# EAGLE board OpenBook v48 (EAGLE 9.7.0)
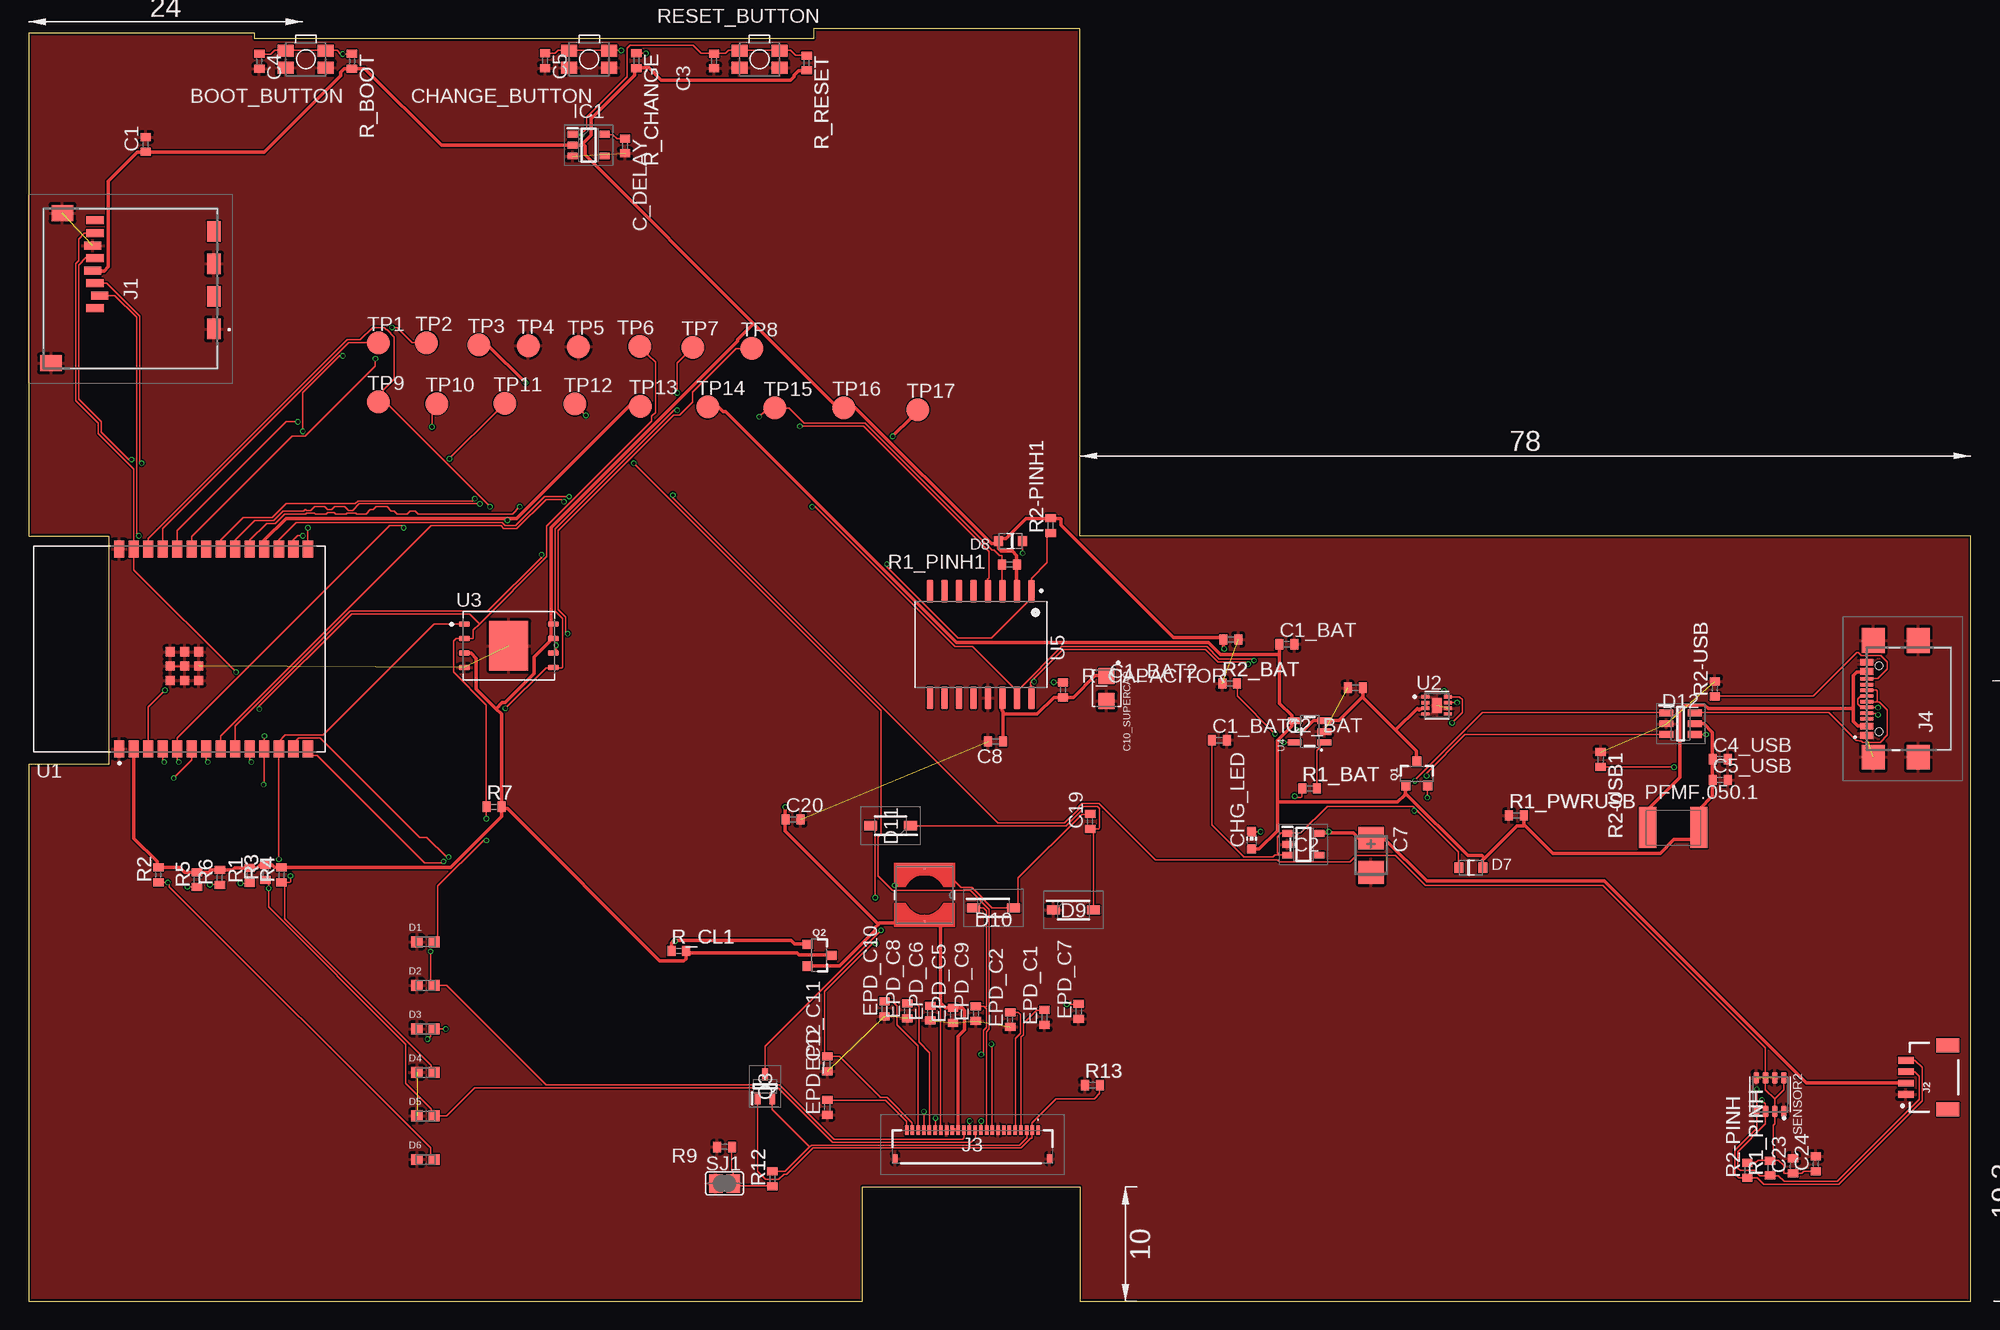
[diagram p0: board, top side]
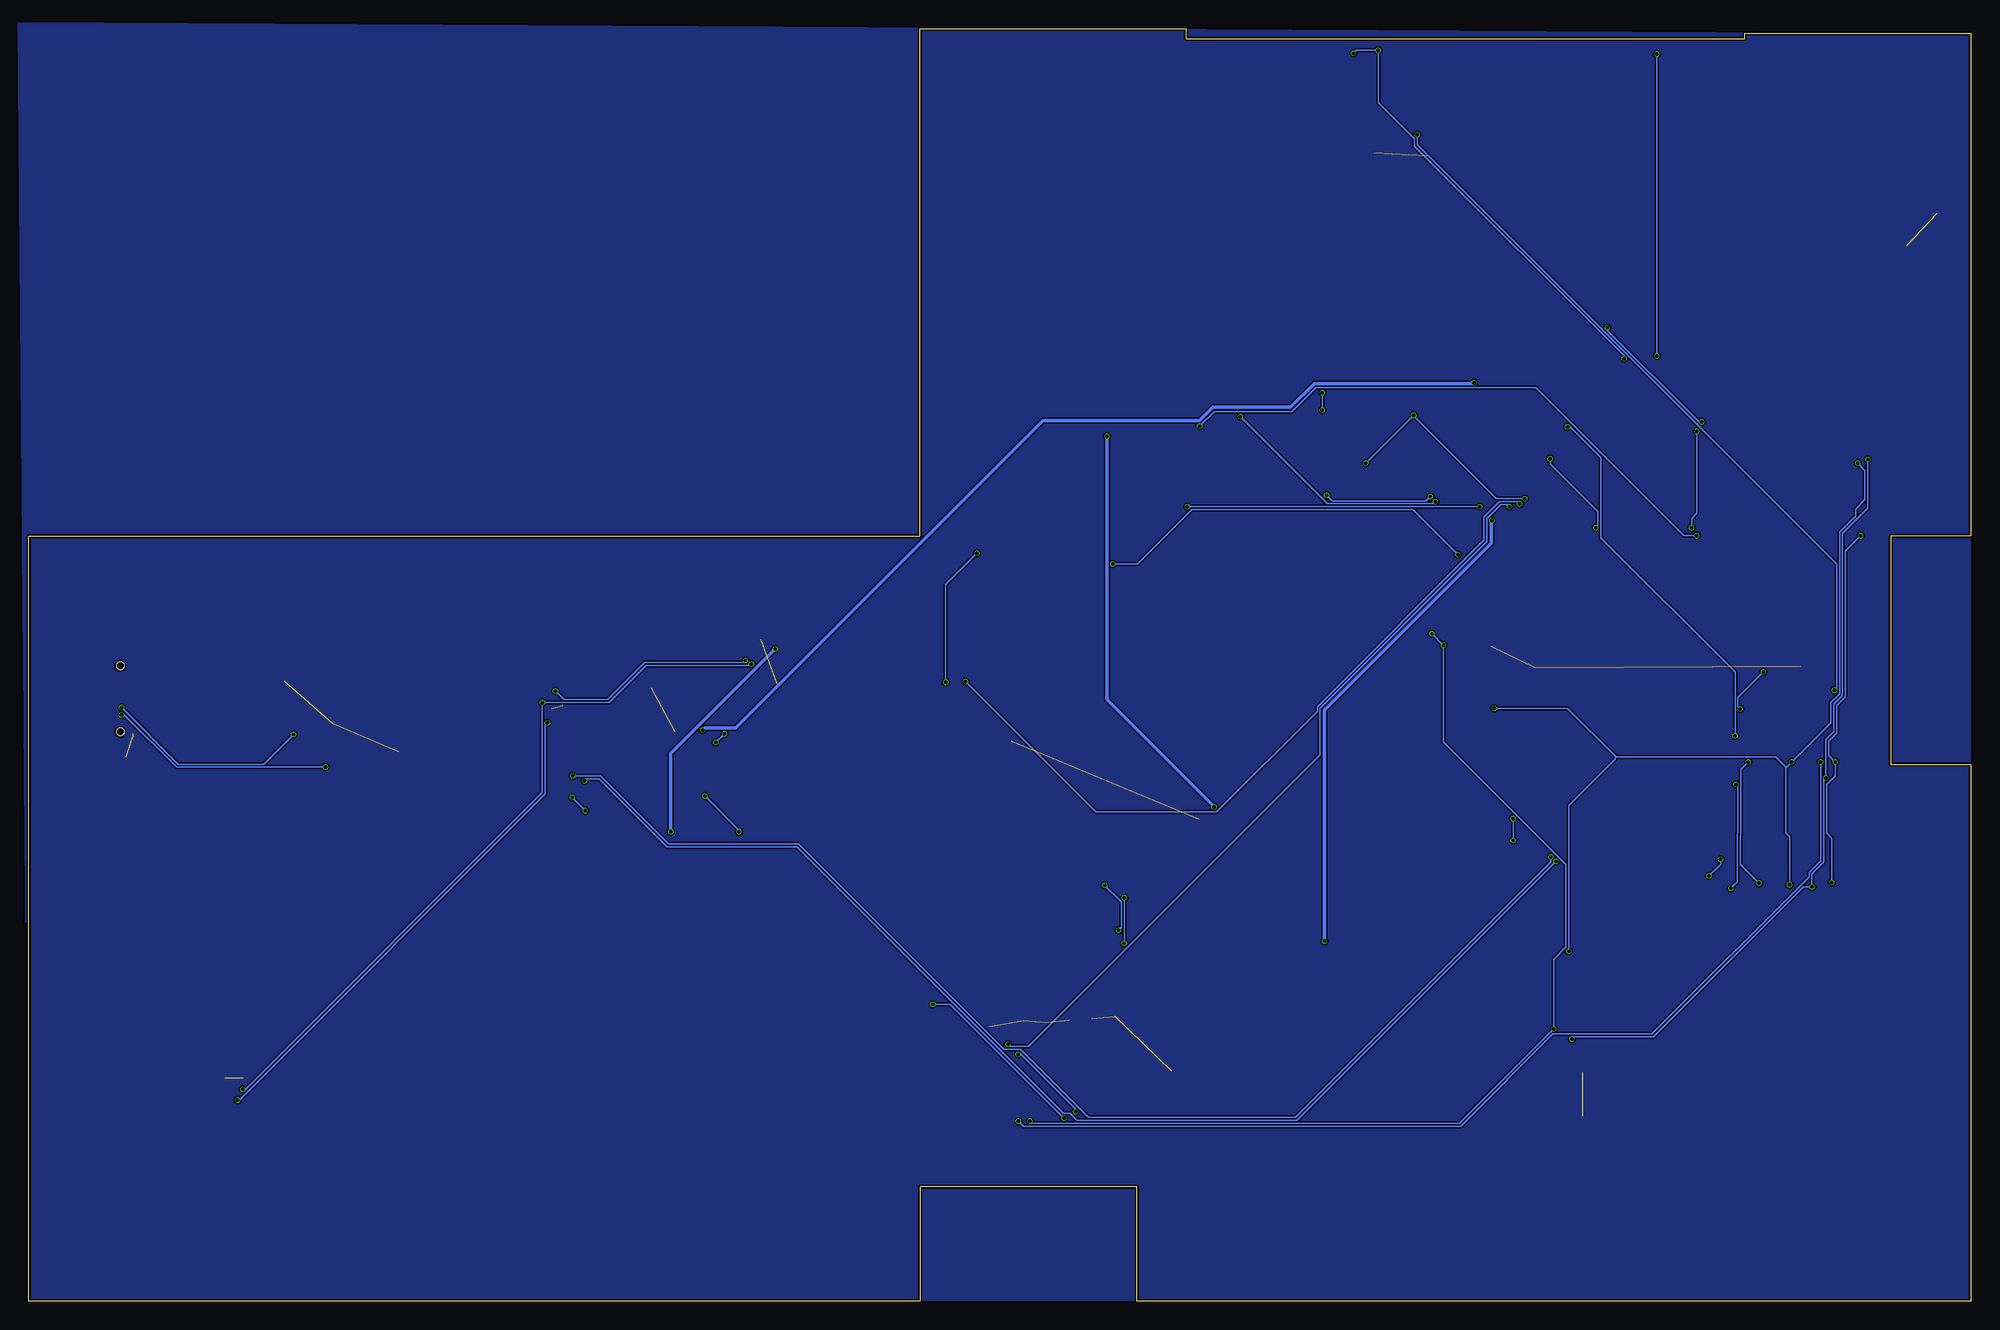
[diagram p1: board, bottom side, seen from below]

Size 170 x 111.4 mm. Coordinates in mm from the lower left corner, seen from the top.
Outline: 0,0 73,0 73,10 92,10 92,0 170,0 170,67 92,67 92,111.4 68.7,111.4 68.7,110.5 19.8,110.5 19.8,111 0,111 0,67 7,67 7,47 0,47 0,0
Copper layers (1*16): Top 0.035mm / dielectric 1.6mm / Bottom 0.035mm
Design rules "jlcpcb-2layers.dru": minimum track width 5mil, minimum drill 0.3mm, track to track 5mil, track to pad 5mil, pad to pad 5mil, via to via 5mil, smd to smd 5mil, copper to edge 0.2mm, drill to drill 6mil, minimum pad ring 10mil, minimum via ring 3mil, stop-mask expansion 4mil, vias tented up to drill 0mil, thermal gap 10mil
Net classes: 1 Alimentare: width 0.3 mm

## Footprints (pad centres in the part's own frame; a part is rotated, then mirrored left to right if it is on the bottom)
MYBUTTON = smd 1.4 x 1.05: 1 1.75,0.75; 2 -1.75,0.75; 3 -1.75,-0.75; 4 1.75,-0.75
EAGLE-LTSPICE_C0402 = smd 0.7 x 0.9: 1 -0.65,0; 2 0.65,0
RCL_CT3528 = smd 2 x 2.2: + -1.5,0; - 1.5,0
CAPCP3225X100N = smd 1.4 x 1.4: 1 -1.1,0; 2 1.1,0
ADAFRUIT_CHIP-LED0603 = smd 0.8 x 0.8: A 0,-0.75; C 0,0.75
DIOC1608X36N = smd 0.97 x 0.94: 1 -0.75,0; 2 0.75,0
ESP32_WROVER_AVX---SD0805S020S1R0_AVX_SD0805S020S1R0_0 = smd 0.8 x 0.9: 1 -1.05,0; 2 1.05,0
SOD3716X135N = smd 1.15 x 0.8: 1 -1.75,0; 2 1.75,0
SOT95P280X145-6N = smd 1.2 x 0.6: 1 -1.25,0.95; 2 -1.25,0; 3 -1.25,-0.95; 4 1.25,-0.95; 5 1.25,0; 6 1.25,0.95
SOT95P280X125-5N = smd 0.9 x 0.6: 1 -1.4,0.95; 2 -1.4,0; 3 -1.4,-0.95; 4 1.4,-0.95; 5 1.4,0.95
SOT95P280X120-5N = smd 0.9 x 0.6: 1 -1.4,0.95; 2 -1.4,0; 3 -1.4,-0.95; 4 1.4,-0.95; 5 1.4,0.95
112ATAARR03ATTEND = smd 1.8 x 1.2: G1 10.6,10.4; G2 4.9,10.4; S1 7.75,10.4; S2 2.05,10.4 | smd 1.4 x 1.9: G3 13.6,-3.85; G4 0.45,-2.85 | smd 0.7 x 1.5: P1 8.8,0; P2 7.7,0.4; P3 6.6,0; P4 5.5,-0.2; P5 4.4,0; P6 3.3,-0.2; P7 2.2,0; P8 1.1,0
JST04_1MM_RA = smd 0.6 x 1.35: 1 -1.5,0; 2 -0.5,0; 3 0.5,0; 4 1.5,0 | smd 1.2 x 2: NC1 2.8,-3.675; NC2 -2.8,-3.675
FH34SRJ24S05SH99 = smd 0.3 x 0.8: 1 5.75,1.45; 2 5.25,1.45; 3 4.75,1.45; 4 4.25,1.45; 5 3.75,1.45; 6 3.25,1.45; 7 2.75,1.45; 8 2.25,1.45; 9 1.75,1.45; 10 1.25,1.45; 11 0.75,1.45; 12 0.25,1.45; 13 -0.25,1.45; 14 -0.75,1.45; 15 -1.25,1.45; 16 -1.75,1.45; 17 -2.25,1.45; 18 -2.75,1.45; 19 -3.25,1.45; 20 -3.75,1.45; 21 -4.25,1.45; 22 -4.75,1.45; 23 -5.25,1.45; 24 -5.75,1.45 | smd 0.4 x 0.8: MP1 6.75,-1.05; MP2 -6.75,-1.05
SAMACSYS_PARTS_USB4110GFA = smd 0.3 x 1.15: A1 -3.35,3.678; A4 -2.55,3.678; A5 -1.25,3.678; A6 -0.25,3.678; A7 0.25,3.678; A8 1.25,3.678; A9 2.55,3.678; A12 3.35,3.678; B1 3.05,3.678; B4 2.25,3.678; B5 1.75,3.678; B6 0.75,3.678; B7 -0.75,3.678; B8 -1.75,3.678; B9 -2.25,3.678; B12 -3.05,3.678 | smd 2.18 x 2: MP1 -5.11,-0.827; MP2 5.11,-0.827; MP3 -5.11,3.103; MP4 5.11,3.103 | hole 0.65: -2.89,2.603; 2.89,2.603
IND_4828-WE-TPC_WRE = smd 0.127 x 0.127: 1 -2.286,0; 2 2.286,0
ESP32C6_VARISTOR_CT/CN1812 = smd 1.5 x 3.6: 1 -2.25,0; 2 2.25,0
ESP32_WROVER_SPARKFUN-DISCRETESEMI_SOT23-3 = smd 0.8 x 0.9: 1 -0.95,-1; 2 0.95,-1; 3 0,1.1
SOT65P210X110-3N = smd 1.05 x 0.5: 1 -1.05,0.65; 2 -1.05,-0.65; 3 1.05,0
ESP32_WROVER_EAGLE-LTSPICE_R0402 = smd 0.7 x 0.9: 1 -0.65,0; 2 0.65,0
ESP32_WROVER_BME680_PSON80P300X300X100-8N = smd 1.016 x 0.5: 1 1.458,1.2; 2 1.458,0.4; 3 1.458,-0.4; 4 1.458,-1.2; 5 -1.458,-1.22; 6 -1.458,-0.4; 7 -1.458,0.4; 8 -1.458,1.2
SJ = smd 1.168 x 1.6: 1 -0.762,0; 2 0.762,0
TP20R = smd 2 x 2: TP 0,0
XCVR_ESP32-C6-WROOM-1-N8 = smd 1.5 x 0.9: 1 -8.75,5.26; 2 -8.75,3.99; 3 -8.75,2.72; 4 -8.75,1.45; 5 -8.75,0.18; 6 -8.75,-1.09; 7 -8.75,-2.36; 8 -8.75,-3.63; 9 -8.75,-4.9; 10 -8.75,-6.17; 11 -8.75,-7.44; 12 -8.75,-8.71; 13 -8.75,-9.98; 14 -8.75,-11.25; 15 8.75,-11.25; 16 8.75,-9.98; 17 8.75,-8.71; 18 8.75,-7.44; 19 8.75,-6.17; 20 8.75,-4.9; 21 8.75,-3.63; 22 8.75,-2.36; 23 8.75,-1.09; 24 8.75,0.18; 25 8.75,1.45; 26 8.75,2.72; 27 8.75,3.99; 28 8.75,5.26 | smd 0.8 x 0.8: 29_1 -2.755,0.79; 29_2 -1.505,0.79; 29_3 -0.255,0.79; 29_4 -2.755,-0.46; 29_5 -1.505,-0.46; 29_6 -0.255,-0.46; 29_7 -2.755,-1.71; 29_8 -1.505,-1.71; 29_9 -0.255,-1.71
SON50P200X200X80-9N = smd 0.76 x 0.27: 1 -0.985,0.75; 2 -0.985,0.25; 3 -0.985,-0.25; 4 -0.985,-0.75; 5 0.985,-0.75; 6 0.985,-0.25; 7 0.985,0.25; 8 0.985,0.75 | smd 0.9 x 1.3: 9 0,0
SON127P600X800X80-9N = smd 0.94 x 0.44: 1 -3.895,1.905; 2 -3.895,0.635; 3 -3.895,-0.635; 4 -3.895,-1.905; 5 3.895,-1.905; 6 3.895,-0.635; 7 3.895,0.635; 8 3.895,1.905 | smd 3.4 x 4.3: 9 0,0
ESP32_WROVER_SPARKFUN-IC-POWER_SOT23-5 = smd 0.55 x 1.2: 1 -0.95,-1.3; 2 0,-1.3; 3 0.95,-1.3; 4 0.95,1.3; 5 -0.95,1.3
SOIC127P1032X265-16N = smd 2.05 x 0.59: 1 -4.655,4.445; 2 -4.655,3.175; 3 -4.655,1.905; 4 -4.655,0.635; 5 -4.655,-0.635; 6 -4.655,-1.905; 7 -4.655,-3.175; 8 -4.655,-4.445; 9 4.655,-4.445; 10 4.655,-3.175; 11 4.655,-1.905; 12 4.655,-0.635; 13 4.655,0.635; 14 4.655,1.905; 15 4.655,3.175; 16 4.655,4.445

## Placement (x,y rotation side)
BOOT_BUTTON  [MYBUTTON]  24.27,108.71 180 top
C1  100nF  [EAGLE-LTSPICE_C0402]  10.25,101.26 90 top
C1_BAT  4.7uF  [EAGLE-LTSPICE_C0402]  110.12,57.51 0 top
C1_BAT1  4.7uF  [EAGLE-LTSPICE_C0402]  104.23,49.11 0 top
C1_BAT2  4.7uF  [EAGLE-LTSPICE_C0402]  105.23,57.92 0 top
C2_BAT  4.7uF  [EAGLE-LTSPICE_C0402]  116.12,53.7 180 top
C3  1uF  [EAGLE-LTSPICE_C0402]  60,108.56 270 top
C4  100nF  [EAGLE-LTSPICE_C0402]  20.2,108.53 270 top
C4_USB  100nF  [EAGLE-LTSPICE_C0402]  148.05,47.44 0 top
C5  100nF  [EAGLE-LTSPICE_C0402]  45.2,108.59 270 top
C5_USB  4.7uF  [EAGLE-LTSPICE_C0402]  148.05,45.63 0 top
C7  100uF TANT  [RCL_CT3528]  117.5,39.03 270 top
C8  100nF  [EAGLE-LTSPICE_C0402]  84.63,49 180 top
C10_SUPERCAP  CPH3225A  [CAPCP3225X100N]  94.35,53.64 270 top
C19  4.7uF/25V  [EAGLE-LTSPICE_C0402]  92.91,41.99 90 top
C20  10uF  [EAGLE-LTSPICE_C0402]  66.91,42.18 0 top
C23  100nF  [EAGLE-LTSPICE_C0402]  154.43,11.85 90 top
C24  100nF  [EAGLE-LTSPICE_C0402]  156.43,12.04 90 top
C_DELAY  100nF  [EAGLE-LTSPICE_C0402]  52.2,101.12 270 top
CHANGE_BUTTON  [MYBUTTON]  49.07,108.71 180 top
CHG_LED  [ADAFRUIT_CHIP-LED0603]  107.04,40.35 0 top
D1  PGB1010603MR  [DIOC1608X36N]  34.74,31.46 0 top
D2  PGB1010603MR  [DIOC1608X36N]  34.74,27.65 0 top
D3  PGB1010603MR  [DIOC1608X36N]  34.74,23.84 0 top
D4  PGB1010603MR  [DIOC1608X36N]  34.74,20.03 0 top
D5  PGB1010603MR  [DIOC1608X36N]  34.74,16.22 0 top
D6  PGB1010603MR  [DIOC1608X36N]  34.74,12.41 0 top
D7  ESP32_WROVER_AVX---SD0805S020S1R0_AVX_SD0805S020S1R0_0_0AVX_SD0805S020S1R0_0_0  [ESP32_WROVER_AVX---SD0805S020S1R0_AVX_SD0805S020S1R0_0]  126.23,37.95 0 top
D8  ESP32_WROVER_AVX---SD0805S020S1R0_AVX_SD0805S020S1R0_0_0AVX_SD0805S020S1R0_0_0  [ESP32_WROVER_AVX---SD0805S020S1R0_AVX_SD0805S020S1R0_0]  85.93,66.53 180 top
D9  MBR0530  [SOD3716X135N]  91.45,34.24 0 top
D10  MBR0530  [SOD3716X135N]  84.45,34.43 0 top
D11  MBR0530  [SOD3716X135N]  75.45,41.62 180 top
D12  USBLC6-2SC6Y  [SOT95P280X145-6N]  144.59,50.55 0 top
EPD_C1  1uF/50V  [EAGLE-LTSPICE_C0402]  88.91,24.84 90 top
EPD_C2  1uF/50V  [EAGLE-LTSPICE_C0402]  85.91,24.65 90 top
EPD_C5  1uF/50V  [EAGLE-LTSPICE_C0402]  80.91,25.03 90 top
EPD_C6  1uF/50V  [EAGLE-LTSPICE_C0402]  78.91,25.22 90 top
EPD_C7  1uF/50V  [EAGLE-LTSPICE_C0402]  91.91,25.36 90 top
EPD_C8  1uF/50V  [EAGLE-LTSPICE_C0402]  76.91,25.41 90 top
EPD_C9  1uF/50V  [EAGLE-LTSPICE_C0402]  82.91,25.17 90 top
EPD_C10  1uF/50V  [EAGLE-LTSPICE_C0402]  74.91,25.6 90 top
EPD_C11  1uF/50V  [EAGLE-LTSPICE_C0402]  69.91,20.79 90 top
EPD_C12  1uF/50V  [EAGLE-LTSPICE_C0402]  69.91,16.98 90 top
IC1  BD5229G-TR  [SOT95P280X125-5N]  49.01,101.2 0 top
IC2  XC6220A331MR-G  [SOT95P280X120-5N]  111.58,40 0 top
J1  112A-TAAR-R03_ATTEND  [112ATAARR03ATTEND]  5.82,95.71 270 top
J2  QWIIC_RIGHT_ANGLE  [JST04_1MM_RA]  164.31,19.6 90 top
J3  FH34SRJ-24S-0.5SH_99_  [FH34SRJ24S05SH99]  82.6,13.53 0 top
J4  SAMACSYS_PARTS_USB4110-GF-A  [SAMACSYS_PARTS_USB4110GFA]  164.56,52.73 90 top
L1  68uH  [IND_4828-WE-TPC_WRE]  78.42,35.56 270 top
PFMF.050.1  ESP32C6_VARISTORCN1812  [ESP32C6_VARISTOR_CT/CN1812]  143.95,41.46 0 top
Q1  20V/4.2A/52mΩ/1.4W  [ESP32_WROVER_SPARKFUN-DISCRETESEMI_SOT23-3]  121.5,46.14 0 top
Q2  20V/4.2A/52mΩ/1.4W  [ESP32_WROVER_SPARKFUN-DISCRETESEMI_SOT23-3]  69.18,30.28 270 top
Q3  SI1308EDL-T1-GE3  [SOT65P210X110-3N]  64.45,18.81 90 top
R1  10K  [ESP32_WROVER_EAGLE-LTSPICE_R0402]  19.36,37.26 90 top
R1_BAT  200  [ESP32_WROVER_EAGLE-LTSPICE_R0402]  112.12,44.89 0 top
R1_PINH  10K  [ESP32_WROVER_EAGLE-LTSPICE_R0402]  152.43,11.66 90 top
R1_PINH1  10k  [ESP32_WROVER_EAGLE-LTSPICE_R0402]  85.85,64.48 0 top
R1_PWRUSB  100K  [ESP32_WROVER_EAGLE-LTSPICE_R0402]  130.23,42.52 0 top
R2  10K  [ESP32_WROVER_EAGLE-LTSPICE_R0402]  11.36,37.33 90 top
R2-PINH  10K  [ESP32_WROVER_EAGLE-LTSPICE_R0402]  150.43,11.47 90 top
R2-PINH1  10k  [ESP32_WROVER_EAGLE-LTSPICE_R0402]  89.45,67.89 90 top
R2-USB  5k1  [ESP32_WROVER_EAGLE-LTSPICE_R0402]  147.59,53.6 90 top
R2-USB1  5k1  [ESP32_WROVER_EAGLE-LTSPICE_R0402]  137.59,47.41 270 top
R2_BAT  2K  [ESP32_WROVER_EAGLE-LTSPICE_R0402]  105.12,54.08 0 top
R3  10K  [ESP32_WROVER_EAGLE-LTSPICE_R0402]  20.74,37.52 90 top
R4  10K  [ESP32_WROVER_EAGLE-LTSPICE_R0402]  22.14,37.31 90 top
R5  10K  [ESP32_WROVER_EAGLE-LTSPICE_R0402]  14.74,36.9 90 top
R6  10K  [ESP32_WROVER_EAGLE-LTSPICE_R0402]  16.74,37.09 90 top
R7  10K  [ESP32_WROVER_EAGLE-LTSPICE_R0402]  40.74,43.28 0 top
R9  [ESP32_WROVER_EAGLE-LTSPICE_R0402]  60.91,13.5 0 top
R12  0.47  [ESP32_WROVER_EAGLE-LTSPICE_R0402]  65.1,10.73 90 top
R13  10K  [ESP32_WROVER_EAGLE-LTSPICE_R0402]  93.1,18.92 0 top
R_BOOT  10K  [ESP32_WROVER_EAGLE-LTSPICE_R0402]  28.31,108.53 270 top
R_CAPACITOR  15  [ESP32_WROVER_EAGLE-LTSPICE_R0402]  90.53,53.51 270 top
R_CHANGE  10k  [ESP32_WROVER_EAGLE-LTSPICE_R0402]  53.2,108.58 270 top
R_CL1  10K  [ESP32_WROVER_EAGLE-LTSPICE_R0402]  56.91,30.66 0 top
R_RESET  10K  [ESP32_WROVER_EAGLE-LTSPICE_R0402]  68.1,108.38 270 top
RESET_BUTTON  [MYBUTTON]  63.97,108.71 180 top
SENSOR2  ESP32_WROVER_BME680_BME680  [ESP32_WROVER_BME680_PSON80P300X300X100-8N]  152.43,18.09 270 top
SJ1  [SJ]  60.91,10.31 0 top
TP1  TPTP20R  [TP20R]  30.63,83.87 0 top
TP2  TPTP20R  [TP20R]  34.83,83.89 0 top
TP3  TPTP20R  [TP20R]  39.43,83.71 0 top
TP4  TPTP20R  [TP20R]  43.73,83.63 0 top
TP5  TPTP20R  [TP20R]  48.13,83.55 0 top
TP6  TPTP20R  [TP20R]  53.48,83.57 0 top
TP7  TPTP20R  [TP20R]  58.13,83.49 0 top
TP8  TPTP20R  [TP20R]  63.31,83.39 0 top
TP9  TPTP20R  [TP20R]  30.63,78.71 0 top
TP10  TPTP20R  [TP20R]  35.73,78.57 0 top
TP11  TPTP20R  [TP20R]  41.68,78.59 0 top
TP12  TPTP20R  [TP20R]  47.83,78.53 0 top
TP13  TPTP20R  [TP20R]  53.53,78.35 0 top
TP14  TPTP20R  [TP20R]  59.43,78.27 0 top
TP15  TPTP20R  [TP20R]  65.33,78.19 0 top
TP16  TPTP20R  [TP20R]  71.33,78.21 0 top
TP17  TPTP20R  [TP20R]  77.83,78.03 0 top
U1  ESP32-C6-WROOM-1-N8  [XCVR_ESP32-C6-WROOM-1-N8]  13.19,57.1 90 top
U2  MAX17048G+T10  [SON50P200X200X80-9N]  123.25,52.15 0 top
U3  W25Q512JVEIQ  [SON127P600X800X80-9N]  42.03,57.37 0 top
U4  ESP32_WROVER_SPARKFUN-IC-POWER_MCP73831  [ESP32_WROVER_SPARKFUN-IC-POWER_SOT23-5]  112.12,49.86 90 top
U5  DS3231SN#  [SOIC127P1032X265-16N]  83.34,57.48 270 top

## Library data of the parts
BOOT_BUTTON CHANGE_BUTTON CHG_LED PFMF.050.1 RESET_BUTTON SJ1 TP1-TP17 = DeskAssistant v19 v1
C1 C1_BAT C1_BAT1 C1_BAT2 C2_BAT C3 C4 C4_USB C5 C5_USB C8 C19 C20 C23 C24 C_DELAY EPD_C1 EPD_C2 EPD_C5-EPD_C12 = DeskAssistant v19 v1; SPICEMODEL: NONE; SPICEPREFIX: C
C7 = DeskAssistant v19 v1; SPICEPREFIX: C
C10_SUPERCAP = DeskAssistant v19 v1; AVAILABILITY: Not in stock; CHECK_PRICES: https://www.snapeda.com/parts/CPH3225A/Seiko+Instruments/view-part/?ref=eda; DESCRIPTION: 11 mF (EDLC) Supercapacitor 3.3 V 1210 (3225 Metric) - -; MF: Seiko Instruments; MP: CPH3225A; PACKAGE: 1210 Seiko; PRICE: None; PURCHASE-URL: https://www.snapeda.com/api/url_track_click_mouser/?unipart_id=562593&manufacturer=Seiko Instruments&part_name=CPH3225A&search_term=None; SNAPEDA_LINK: https://www.snapeda.com/parts/CPH3225A/Seiko+Instruments/view-part/?ref=snap
D1-D6 = DeskAssistant v19 v1; AVAILABILITY: In Stock; CHECK_PRICES: https://www.snapeda.com/parts/PGB1010603MR/Littelfuse/view-part/?ref=eda; DESCRIPTION: 150V (Typ) Clamp - Ipp Tvs Diode Surface Mount 0603 (1608 Metric); MF: Littelfuse Inc.; MP: PGB1010603MR; PACKAGE: 0603 Littelfuse Inc.; PRICE: None; PURCHASE-URL: https://www.snapeda.com/api/url_track_click_mouser/?unipart_id=5659453&manufacturer=Littelfuse Inc.&part_name=PGB1010603MR&search_term=None; SNAPEDA_LINK: https://www.snapeda.com/parts/PGB1010603MR/Littelfuse/view-part/?ref=snap
D7 D8 = DeskAssistant v19 v1; CENTROID_NOT_SPECIFIED: No; DATASHEET: http://datasheets.avx.com/schottky.pdf; DIGIKEY_DESCRIPTION: DIODE SCHOTTKY 20V 1A 0805; DIGIKEY_PART_NUMBER: 478-7800-1-ND; LEAD_FREE: yes; MF: AVX; MOUSER_PART_NUMBER: 581-SD0805S020S1R0; PACKAGE: 0805 (2012 metric); PREFIX: D; ROHS: yes; TEMPERATURE_RANGE_HIGH: +125°C; TEMPERATURE_RANGE_LOW: -55°C
D9-D11 = DeskAssistant v19 v1; AVAILABILITY: In Stock; CHECK_PRICES: https://www.snapeda.com/parts/MBR0530/Onsemi/view-part/?ref=eda; DESCRIPTION: Diode Schottky 30 V 500mA Surface Mount SOD-123; MF: ON Semiconductor; MP: MBR0530; PACKAGE: SOD-123-2 ON Semiconductor; PRICE: None; PURCHASE-URL: https://www.snapeda.com/api/url_track_click_mouser/?unipart_id=179458&manufacturer=ON Semiconductor&part_name=MBR0530&search_term=None; SNAPEDA_LINK: https://www.snapeda.com/parts/MBR0530/Onsemi/view-part/?ref=snap
D12 = DeskAssistant v19 v1; AVAILABILITY: In Stock; CHECK_PRICES: https://www.snapeda.com/parts/USBLC6-2SC6Y/STMicroelectronics/view-part/?ref=eda; DESCRIPTION: 17V Clamp 5A (8/20µs) Ipp Tvs Diode Surface Mount SOT-23-6; MF: STMicroelectronics; MP: USBLC6-2SC6Y; PACKAGE: SOT-23-6 STMicroelectronics; PRICE: None; SNAPEDA_LINK: https://www.snapeda.com/parts/USBLC6-2SC6Y/STMicroelectronics/view-part/?ref=snap
IC1 = DeskAssistant v19 v1; DESCRIPTION: Voltage Detector with Adjustable Delay Time: CMOS processes are utilized to develop high precision, low current consumption CMOS reset ICs that allow arbitrary setting of the delay time. The extensive lineup includes both Nch Open Drain and CMOS output types in a wide range of detection voltages (from 2.3V to 6.0V, in 0.1V steps), enabling selection of the ideal solution based on customer requirements. In addition, the entire series is of course both lead-free and RoHS-compliant.; HEIGHT: 1.25mm; MANUFACTURER_NAME: ROHM Semiconductor; MANUFACTURER_PART_NUMBER: BD5229G-TR; MOUSER_PART_NUMBER: 755-BD5229G-TR; MOUSER_PRICE-STOCK: https://www.mouser.co.uk/ProductDetail/ROHM-Semiconductor/BD5229G-TR?qs=4kLU8WoGk0vvnhrrYwdszw%3D%3D
IC2 = DeskAssistant v19 v1; DESCRIPTION: LDO Voltage Regulators; HEIGHT: 1.2mm; MANUFACTURER_NAME: Torex; MANUFACTURER_PART_NUMBER: XC6220A331MR-G; MOUSER_PART_NUMBER: 865-XC6220A331MR-G; MOUSER_PRICE-STOCK: https://www.mouser.co.uk/ProductDetail/Torex-Semiconductor/XC6220A331MR-G?qs=AsjdqWjXhJ8ZSWznL1J0gg%3D%3D
J1 = DeskAssistant v19 v1; DESCRIPTION: Micro SD Card Socket, Push-Push Type, Top Mount, SMT, H=1.83mm, 10u; HEIGHT: 1.9mm; MANUFACTURER_NAME: ATTEND; MANUFACTURER_PART_NUMBER: 112A-TAAR-R03 ATTEND
J2 = DeskAssistant v19 v1; PROD_ID: CONN-13694
J3 = DeskAssistant v19 v1; DESCRIPTION: 24 Position FFC, FPC Connector Contacts, Top and Bottom 0.020" (0.50mm) Surface Mount, Right Angle; HEIGHT: 1.1mm; MANUFACTURER_NAME: Hirose; MANUFACTURER_PART_NUMBER: FH34SRJ-24S-0.5SH(99); MOUSER_PART_NUMBER: 798-FH34SRJ24S05SH99; MOUSER_PRICE-STOCK: https://www.mouser.co.uk/ProductDetail/Hirose-Connector/FH34SRJ-24S-0.5SH99?qs=vcbW%252B4%252BSTIpKBl5ap9J8Fw%3D%3D
J4 = DeskAssistant v19 v1; DESCRIPTION: CONN USB 2.0 TYPE-C R/A SMT; HEIGHT: 3.26mm; MANUFACTURER_NAME: GCT (GLOBAL CONNECTOR TECHNOLOGY); MANUFACTURER_PART_NUMBER: USB4110-GF-A; MOUSER_PART_NUMBER: 640-USB4110-GF-A; MOUSER_PRICE-STOCK: https://www.mouser.co.uk/ProductDetail/GCT/USB4110-GF-A?qs=KUoIvG%2F9IlYiZvIXQjyJeA%3D%3D
L1 = DeskAssistant v19 v1; COPYRIGHT: Copyright (C) 2024 Ultra Librarian. All rights reserved.; MANUFACTURER_PART_NUMBER: 744043680; MFR_NAME: Wurth Electronics
Q1 Q2 = DeskAssistant v19 v1; PROD_ID: TRAN-14388
Q3 = DeskAssistant v19 v1; AVAILABILITY: In Stock; CHECK_PRICES: https://www.snapeda.com/parts/SI1308EDL-T1-GE3/Vishay+Siliconix/view-part/?ref=eda; DESCRIPTION: Si1308EDL-T1-GE3 N-channel MOSFET Transistor, 1.5 A, 30 V, 3-Pin SC-70 | Siliconix / Vishay SI1308EDL-T1-GE3; MF: Vishay Siliconix; MP: SI1308EDL-T1-GE3; PACKAGE: SOT-323 Vishay Semiconductor; PRICE: None; PURCHASE-URL: https://www.snapeda.com/api/url_track_click_mouser/?unipart_id=274603&manufacturer=Vishay Siliconix&part_name=SI1308EDL-T1-GE3&search_term=None; SNAPEDA_LINK: https://www.snapeda.com/parts/SI1308EDL-T1-GE3/Vishay+Siliconix/view-part/?ref=snap
R1 R1_BAT R1_PINH R1_PINH1 R1_PWRUSB R2 R2-PINH R2-PINH1 R2-USB R2-USB1 R2_BAT R3-R7 R9 R12 R13 R_BOOT R_CAPACITOR R_CHANGE R_CL1 R_RESET = DeskAssistant v19 v1; SPICEMODEL: NONE; SPICEPREFIX: R
SENSOR2 = DeskAssistant v19 v1; AVAILABILITY: Unavailable; DESCRIPTION: Integrated Environmental Unit; MF: Bosch Sensortec; MP: BME680; PACKAGE: LGA-8 Bosch Tools; PRICE: None
U1 = DeskAssistant v19 v1; AVAILABILITY: In Stock; CHECK_PRICES: https://www.snapeda.com/parts/ESP32-C6-WROOM-1-N8/Espressif+Systems/view-part/?ref=eda; DESCRIPTION: Multiprotocol Modules ESP32-C6 module, Wi-Fi 6 in 2.4 GHz band, Bluetooth 5, Zigbee 3.0 and Thread. ESP34-WROOM Compatible - ENGINEERING SAMPLE; MF: Espressif Systems; MP: ESP32-C6-WROOM-1-N8; PACKAGE: None; PRICE: None; SNAPEDA_LINK: https://www.snapeda.com/parts/ESP32-C6-WROOM-1-N8/Espressif+Systems/view-part/?ref=snap
U2 = DeskAssistant v19 v1; AVAILABILITY: In Stock; CHECK_PRICES: https://www.snapeda.com/parts/MAX17048G+T10/Analog+Devices/view-part/?ref=eda; DESCRIPTION: 3µA 1-Cell/2-Cell Fuel Gauge with ModelGauge; MF: Analog Devices; MP: MAX17048G+T10; PACKAGE: TDFN-8 Maxim; PRICE: None; PURCHASE-URL: https://www.snapeda.com/api/url_track_click_mouser/?unipart_id=329239&manufacturer=Analog Devices&part_name=MAX17048G+T10&search_term=None; SNAPEDA_LINK: https://www.snapeda.com/parts/MAX17048G+T10/Analog+Devices/view-part/?ref=snap
U3 = DeskAssistant v19 v1; AVAILABILITY: In Stock; CHECK_PRICES: https://www.snapeda.com/parts/W25Q512JVEIQ/Winbond+Electronics/view-part/?ref=eda; DESCRIPTION: FLASH - NOR Memory IC 512Mb (64M x 8) SPI - Quad I/O 133 MHz 8-WSON (8x6); MF: Winbond Electronics; MP: W25Q512JVEIQ; PACKAGE: Package; PRICE: None; SNAPEDA_LINK: https://www.snapeda.com/parts/W25Q512JVEIQ/Winbond+Electronics/view-part/?ref=snap
U4 = DeskAssistant v19 v1; PROD_ID: IC-09995
U5 = DeskAssistant v19 v1; AVAILABILITY: In Stock; CHECK_PRICES: https://www.snapeda.com/parts/DS3231SN%23/Analog+Devices/view-part/?ref=eda; DESCRIPTION: Extremely Accurate I²C-Integrated RTC/TCXO/Crystal; MF: Analog Devices; MP: DS3231SN#; PACKAGE: SOIC-16 Maxim; PRICE: None; PURCHASE-URL: https://www.snapeda.com/api/url_track_click_mouser/?unipart_id=99048&manufacturer=Analog Devices&part_name=DS3231SN#&search_term=None; SNAPEDA_LINK: https://www.snapeda.com/parts/DS3231SN%23/Analog+Devices/view-part/?ref=snap

## Nets
3V3 [Alimentare]: C1.1 C1_BAT2.1 C7.+ D8.2 IC1.2 IC2.5 J1.P4 J2.2 Q2.3 R1.2 R1_PINH1.2 R2-PINH1.2 R2.2 R3.2 R4.2 R5.2 R6.2 R7.2 R_BOOT.2 R_CHANGE.2 R_CL1.2 R_RESET.2 TP16.TP U1.2 U3.3 U3.7 U3.8 U5.2
32KHZ: R2-PINH1.1 U1.9 U5.1
DN: D12.4 J4.A7 J4.B7
DP: D12.6 J4.A6 J4.B6
EPD_3V3 [Alimentare]: C20.1 EPD_C5.2 J3.15 J3.16 L1.2 Q2.2 TP17.TP
EPD_3V3_C [Alimentare]: Q2.1 R_CL1.1 TP13.TP U1.18
EPD_BUSY: J3.9 TP9.TP U1.26
EPD_CS: D5.2 J3.12 R3.1 TP10.TP U1.11
EPD_DC: J3.11 TP11.TP U1.5
EPD_RST: J3.10 TP12.TP U1.21
FLASH_CS: D4.2 R4.1 U1.12 U3.1
GDR: J3.2 Q3.1 R13.2
GND: BOOT_BUTTON.1 BOOT_BUTTON.2 C1.2 C1_BAT1.2 C1_BAT2.2 C1_BAT.2 C2_BAT.2 C3.2 C4.2 C4_USB.2 C5.2 C5_USB.2 C7.- C8.2 C10_SUPERCAP.2 C20.2 C23.2 C24.2 C_DELAY.2 CHANGE_BUTTON.1 CHANGE_BUTTON.2 D1.1 D2.1 D3.1 D4.1 D5.1 D6.1 D9.1 D12.2 EPD_C1.1 EPD_C2.1 EPD_C5.1 EPD_C6.1 EPD_C7.1 EPD_C8.1 EPD_C9.1 EPD_C10.1 EPD_C11.1 EPD_C12.1 IC1.3 IC2.2 J1.G1 J1.G2 J1.G3 J1.G4 J1.P6 J2.1 J3.8 J3.17 J3.MP1 J3.MP2 J4.A1 J4.A12 J4.B1 J4.B12 J4.MP1 J4.MP2 J4.MP3 J4.MP4 R1_PWRUSB.1 R2-USB1.1 R2-USB.2 R2_BAT.1 R9.1 R13.1 RESET_BUTTON.1 RESET_BUTTON.2 SENSOR2.1 SENSOR2.5 SENSOR2.7 SJ1.1 TP4.TP TP5.TP U1.1 U1.28 U1.29_1 U1.29_2 U1.29_3 U1.29_4 U1.29_5 U1.29_6 U1.29_7 U1.29_8 U1.29_9 U2.1 U2.4 U2.6 U2.9 U3.4 U3.9 U4.2 U5.13
GPIO8: R1.1 U1.10
I2C_PW: C23.1 C24.1 R1_PINH.2 R2-PINH.2 SENSOR2.2 SENSOR2.6 SENSOR2.8 U1.17
INT_RTC: R1_PINH1.1 TP15.TP U1.8 U5.3
IO/BOOT: BOOT_BUTTON.3 BOOT_BUTTON.4 C4.1 R_BOOT.1 U1.15
IO/CHANGE: C5.1 CHANGE_BUTTON.3 CHANGE_BUTTON.4 R_CHANGE.1 U1.23
MISO: D1.2 J1.P7 R7.1 TP6.TP U1.27 U3.2
MOSI: D2.2 J1.P3 J3.14 R6.1 TP7.TP U1.7 U3.5
N$3: C_DELAY.1 IC1.5
N$4: C1_BAT1.1 D7.1 IC2.1 IC2.3 Q1.2
N$5: CHG_LED.C R1_BAT.1
N$6: R1_BAT.2 U4.1
N$7: R2_BAT.2 U4.5
N$8: D8.1 R_CAPACITOR.1
N$11: C19.1 D9.2 D11.1
N$12: J4.A5 R2-USB1.2
N$13: J4.B5 R2-USB.1
N$18: EPD_C2.2 J3.5
N$19: EPD_C1.2 J3.4
N$20: EPD_C6.2 J3.18
N$21: EPD_C8.2 J3.20
N$22: EPD_C10.2 J3.22
N$25: EPD_C7.2 J3.19
N$26: EPD_C12.2 J3.24
PREVGH: D10.1 EPD_C9.2 J3.21
PREVGL: D11.2 EPD_C11.2 J3.23
RESE: J3.3 Q3.2 R12.2
RESE': R9.2 R12.1 SJ1.2
RESET: C3.1 IC1.1 R_RESET.1 RESET_BUTTON.3 RESET_BUTTON.4 U1.3
RTC_RST: U1.16 U5.4
RX: TP2.TP U1.24
SCK: D3.2 J1.P5 J3.13 R5.1 TP8.TP U1.6 U3.6
SCL: J2.4 R2-PINH.1 SENSOR2.4 U1.20 U2.7 U5.16
SDA: J2.3 R1_PINH.1 SENSOR2.3 U1.19 U2.8 U5.15
SRC: C19.2 D10.2 L1.1 Q3.3
SS_SD: D6.2 J1.P2 R2.1 U1.4
TX: TP1.TP U1.25
USB_D+: D12.1 U1.14
USB_D-: D12.3 U1.13
VBAT [Alimentare]: C2_BAT.1 Q1.3 TP3.TP U2.2 U2.3 U4.3
VBUS [Alimentare]: C1_BAT.1 C4_USB.1 C5_USB.1 CHG_LED.A D7.2 D12.5 PFMF.050.1.2 Q1.1 R1_PWRUSB.2 TP14.TP U4.4
VRTC [Alimentare]: C8.1 C10_SUPERCAP.1 R_CAPACITOR.2 U5.14
VUSB [Alimentare]: J4.A4 J4.A9 J4.B4 J4.B9 PFMF.050.1.1

## Tracks (layer width: path | path; a pad name or v marks a point on that pad's centre or on a via)
3V3  (via drill 0.3)
  Top 0.3: U1.2 9.21,48.34 9.21,40.53 11.24,38.5 11.24,38.05 R2.2 13.21,37.99 13.65,37.54 14.61,37.54 R5.2 14.8,37.54 15.75,37.54 15.94,37.73 16.7,37.73 R6.2 16.89,37.73 17.84,37.73 18.03,37.92 19.24,37.92 R1.2 19.37,37.92 20,37.92 20.26,38.18 20.7,38.18 R3.2 20.89,38.18 21.34,38.18 21.53,37.99 22.1,37.99 R4.2 22.23,37.99 36.96,37.99 41.4,42.43 41.4,43 R7.2 | Q2.3 70.23,30.3 67.44,30.3 67.25,30.49 57.98,30.49 57.85,30.37 57.53,30.37 57.53,30.62 R_CL1.2 57.53,30.24 57.53,29.99 57.34,29.8 55.24,29.8 41.91,43.13 41.4,43.13 R7.2 | 40.93,51.86 39.18,53.61 39.18,56.28 38.73,56.72 38.16,56.72 U3.3 | 40.93,51.86 41.4,51.39 41.4,43.32 R7.2 | 40.93,51.86 41.47,52.4 41.72,52.4 44.26,54.94 44.26,56.4 45.59,57.74 45.59,57.86 U3.7 45.66,57.99 45.66,58.18 45.72,58.24 45.72,59.26 U3.8 45.72,59.39 45.72,67.71 62.04,84.03 62.04,84.15 63.47,85.58 | 113.79,40.97 115.95,40.97 116.39,40.53 117.47,40.53 C7.+ 117.6,40.53 118.62,40.53 122.36,36.78 137.92,36.78 155.57,19.13 164.27,19.13 J2.2 | 113.79,40.97 113.03,40.97 IC2.5 | U5.2 86.49,62.18 86.49,64.47 R1_PINH1.2 86.49,64.59 86.49,65.29 86.11,65.67 85.09,65.67 84.9,65.86 84.9,66.5 D8.2 | D8.2 84.9,66.63 84.9,66.75 85.53,66.75 87.31,68.53 89.41,68.53 R2-PINH1.2 89.6,68.53 90.3,68.53 90.36,68.47 90.36,67.96 100.2,58.12 104.2,58.12 104.27,58.18 104.58,58.18 C1_BAT2.1 104.58,57.8 104.58,57.16 v104.65,57.1 | D8.2 84.77,66.31 84.26,66.31 72.39,78.18 71.37,78.18 TP16.TP 71.18,78.18 70.61,78.18 70.55,78.25 70.55,78.5 63.47,85.58 | 48.48,101.33 49.21,102.06 49.21,103.52 53.02,107.33 53.02,107.97 53.15,107.97 R_CHANGE.2 53.34,107.97 54.29,107.97 55.37,106.89 66.67,106.89 66.99,107.2 66.99,107.33 67.37,107.71 68.07,107.71 R_RESET.2
  Top 0.3: 48.48,101.33 48.32,101.17 47.62,101.17 IC1.2 47.5,101.17 36.13,101.17 29.4,107.9 28.45,107.9 R_BOOT.2 28.26,107.9 27.62,107.9 27.3,107.58 27.3,107.27 20.64,100.6 10.35,100.6 C1.1 10.22,100.6 9.53,100.6 6.99,98.06 6.99,90.57 6.6,90.18 5.65,90.18 J1.P4 | 63.47,85.58 48.7,100.34 48.7,101.11 48.48,101.33 | v113.79,41.1 113.79,40.97
  Bottom 0.3: v113.79,41.1 113.79,47.96 v104.65,57.1
32KHZ  (via drill 0.3)
  Top 0.127: R2-PINH1.1 89.41,67.26 89.09,67.26 89.09,66.94 89.15,66.88 89.15,64.66 87.76,63.26 87.76,62.18 U5.1 87.76,62.12 87.76,61.35 87.69,61.29 87.5,61.29 84.26,58.05 81.34,58.05 75.12,64.28 v75.12,64.53 | v44.9,65.36 44.9,65.1 40.2,60.4 28.13,60.4 18.1,50.37 18.1,48.4 U1.9
  Bottom 0.127: v44.9,65.36 48.83,69.29 68.2,69.29 72.96,64.53 v75.12,64.53
DN  (via drill 0.3)
  Top 0.127: J4.A7 160.84,52.97 160.34,52.97 160.08,52.72 160.08,52.27 160.4,51.96 160.84,51.96 J4.B7 160.91,51.96 v161.86,51.96 | v146.81,49.61 145.86,49.61 D12.4
  Bottom 0.127: v146.81,49.61 149.42,47.01 156.91,47.01 v161.86,51.96
DP
  Top 0.127: 161.77,52.5 161.8,52.53 161.8,53.42 161.73,53.48 160.91,53.48 J4.B6 | 161.77,52.5 161.73,52.47 160.91,52.47 J4.A6 | D12.6 145.86,51.51 157.54,51.51 159.96,49.1 160.15,49.1 160.21,49.04 160.4,49.04 160.53,48.91 162.05,48.91 162.69,49.54 162.69,51.77 161.99,52.47 161.8,52.47 161.77,52.5
EPD_3V3  (via drill 0.3)
  Top 0.3: J3.16 80.9,15 81.28,15 81.34,15.06 81.41,15 J3.15 81.34,15.19 81.34,23.19 81.92,23.76 81.92,25.48 81.72,25.67 81.03,25.67 EPD_C5.2 80.9,25.67 80.26,25.67 79.82,26.11 79.82,32.97 79.5,33.29 78.55,33.29 L1.2 78.36,33.29 77.28,33.29 77.09,33.1 74.49,33.1 74.39,33 | 74.39,33 74.11,32.72 74.11,32.46 70.99,29.35 68.2,29.35 Q2.2 | 74.39,33 66.23,41.16 66.23,42.18 C20.1 66.23,42.3 v66.23,43.26 | v75.63,75.71 77.28,77.36 77.28,78.06 77.79,78.06 TP17.TP
  Bottom 0.3: v75.63,75.71 75.63,52.66 v66.23,43.26
EPD_3V3_C  (via drill 0.3)
  Top 0.3: 56.45,31.57 56.26,31.38 56.26,30.68 R_CL1.1 | 56.45,31.57 66.74,31.57 67.06,31.26 68.14,31.26 Q2.1 | 41.91,68.53 42.74,68.53 52.58,78.37 53.47,78.37 TP13.TP | 41.91,68.53 22.54,68.53 20.64,66.63 20.64,65.86 U1.18 | v56.58,31.51 56.45,31.57 | v41.91,68.34 41.91,68.53
  Bottom 0.3: v56.58,31.51 56.58,51.77 41.97,66.37 41.97,68.28 v41.91,68.34
EPD_BUSY  (via drill 0.3)
  Top 0.127: v84.26,22.49 84.33,22.43 84.33,15 J3.9 | v40.39,69.55 31.5,78.44 31.5,78.63 31.43,78.69 31.05,78.69 | 31.05,78.69 30.67,78.69 TP9.TP 31.05,78.69 | 31.05,78.69 31.05,79.77 32,80.72 32,84.41 31.37,85.04 31.3,85.04 31.11,85.23 30.1,85.23 29.02,84.15 27.88,84.15 10.48,66.75 10.48,65.86 U1.26
  Bottom 0.127: v84.26,22.49 84.07,22.3 82.49,22.3 56.96,47.83 56.96,51.89 42.35,66.5 42.35,68.53 41.15,69.74 40.58,69.74 v40.39,69.55
EPD_CS  (via drill 0.3)
  Top 0.127: J3.12 82.87,14.94 82.87,14.3 82.49,13.92 70.36,13.92 65.6,18.68 39.05,18.68 36.58,16.21 35.5,16.21 D5.2 35.43,16.21 35.24,16.21 35.24,16.84 33.02,19.06 33.02,22.49 21.02,34.5 v21.02,36.15 21.02,36.46 21.08,36.53 21.08,36.84 20.77,36.84 R3.1 | v20.57,45.23 20.64,45.29 20.64,48.34 U1.11 20.64,48.4 v20.64,49.48 | v35.31,76.53 35.31,77.74 35.24,77.8 35.24,78.56 35.69,78.56 TP10.TP
  Bottom 0.127: v20.57,45.23 20.38,45.04 20.38,40.97 20.45,40.91 20.45,36.72 v21.02,36.15 | v35.31,76.53 35.05,76.53 32.38,73.87 32.38,66.82 20.64,55.07 v20.64,49.48
EPD_DC  (via drill 0.3)
  Top 0.127: v83.38,15.76 83.38,15 J3.11 | v13.14,47.2 13.02,47.32 13.02,48.34 U1.5 13.02,48.4 13.02,49.29 31.62,67.9 32.64,67.9 v32.83,67.71 | v36.83,73.74 40.96,77.86 40.96,78.56 41.66,78.56 TP11.TP
  Bottom 0.127: v83.38,15.76 82.93,15.32 44.64,15.32 36.58,23.38 27.94,23.38 14.16,37.16 14.16,37.54 13.14,38.56 v13.14,47.2 | v36.83,73.74 36.83,73.29 32.64,69.1 32.64,67.9 v32.83,67.71
EPD_RST  (via drill 0.3)
  Top 0.127: v52.96,73.36 74.61,51.7 74.61,40.91 74.36,40.65 74.36,37.23 75.63,35.96 82.42,35.96 84.07,34.3 84.07,23.83 83.82,23.57 83.82,15 J3.10 | v48.77,77.55 48.45,77.86 48.45,78.5 47.88,78.5 TP12.TP | v39.05,70.25 38.86,70.06 28.83,70.06 28.57,69.8 22.54,69.8 21.34,68.59 18.8,68.59 16.83,66.63 16.83,65.86 U1.21
  Bottom 0.127: v52.96,73.36 v48.77,77.55 48.77,77.48 41.53,70.25 v39.05,70.25
FLASH_CS  (via drill 0.3)
  Top 0.127: U3.1 38.1,59.26 35.5,59.26 25.78,49.54 22.48,49.54 21.91,48.97 21.91,48.4 U1.12 21.91,48.34 v21.91,38.69 | 22.48,36.65 22.16,36.65 R4.1 22.48,36.65 | 22.48,36.65 22.48,36.34 22.42,36.27 22.42,33.48 35.24,20.65 35.24,20.02 35.43,20.02 D4.2 | v22.92,37.23 22.92,36.72 22.86,36.65 22.48,36.65
  Bottom 0.127: v21.91,38.69 21.91,38.24 v22.92,37.23
GDR
  Top 0.127: R13.2 93.73,18.87 93.73,18.18 93.28,17.73 89.92,17.73 87.82,15.64 87.82,15 J3.2 87.82,14.94 87.82,14.3 87.76,14.24 87.69,14.24 86.87,13.41 68.64,13.41 66.36,11.13 66.1,11.13 65.66,10.68 64.52,10.68 63.82,11.38 63.82,17.73 Q3.1
GND  (19 unrouted)
  Top 0.127: U1.29_5 13.59,55.58 12.45,55.58 U1.29_2
  pour Top: 0.08,0.08 169.92,0.08 169.92,111.92 0.08,110.92
  pour Bottom: 0.08,0.08 169.92,0.08 170.92,111.92 0.08,110.92
GPIO8  (via drill 0.3)
  Top 0.127: v18.54,36.59 19.3,36.59 R1.1 | v19.49,47.2 19.37,47.32 19.37,48.34 U1.10
  Bottom 0.127: v18.54,36.59 20.19,38.24 20.19,40.78 20.13,40.84 20.13,46.56 v19.49,47.2
I2C_PW  (via drill 0.3)
  Top 0.127: R2-PINH.2 150.43,12.14 151.19,12.14 151.38,12.33 152.4,12.33 R1_PINH.2 | C24.1 156.4,11.38 155.38,11.38 155.19,11.19 C23.1 154.37,11.19 153.67,11.19 153.61,11.25 153.61,11.89 153.16,12.33 152.72,12.33 | 152.72,12.33 152.46,12.33 R1_PINH.2 | 152.81,17.7 152.84,17.67 152.84,16.65 SENSOR2.2 152.84,16.59 152.84,15.51 152.72,15.38 152.72,12.33 | 152.81,17.7 152.02,18.49 152.02,19.51 SENSOR2.6 152.02,19.57 152.02,22.18 137.79,36.4 122.24,36.4 119.63,39 116.2,39 115.63,38.43 109.47,38.43 109.28,38.62 98.61,38.62 93.66,43.58 92.2,43.58 91.89,43.26 91.89,43.07 90.68,41.86 84.84,41.86 56.39,70.31 v56.39,70.56 | 152.81,17.7 153.61,18.49 153.61,19.51 SENSOR2.8 | v47.31,70.44 45.15,70.44 42.61,67.9 41.72,67.9 41.47,68.15 23.43,68.15 21.91,66.63 21.91,65.86 U1.17 | 152.72,12.33 R1_PINH.2
  Bottom 0.127: v47.31,70.44 47.69,70.06 55.88,70.06 v56.39,70.56
INT_RTC  (via drill 0.3)
  Top 0.127: U5.3 85.22,62.18 85.22,64.47 R1_PINH1.1 85.22,64.53 85.22,65.23 85.15,65.29 84.96,65.29 84.52,65.74 84.33,65.74 73.22,76.85 67.88,76.85 66.55,78.18 TP15.TP 65.28,78.18 64.52,78.18 64.45,78.12 64.45,77.93 v63.94,77.42 | v46.86,69.99 46.67,70.18 45.28,70.18 42.74,67.64 41.59,67.64 41.34,67.9 35.24,67.9 16.83,49.48 16.83,48.4 U1.8
  Bottom 0.127: v46.86,69.99 47.05,69.8 56.33,69.8 v63.94,77.42
IO/BOOT  (via drill 0.3)
  Top 0.127: C4.1 20.26,109.17 21.21,109.17 21.53,109.49 22.48,109.49 BOOT_BUTTON.4 22.54,109.49 25.97,109.49 BOOT_BUTTON.3 26.04,109.49 26.99,109.49 27.3,109.17 v27.5,109.17 28.26,109.17 R_BOOT.1 | v24.45,67.71 24.45,65.86 U1.15 | v24,76.15 24,79.52 27.24,82.75 v27.5,82.75
  Bottom 0.127: v24.45,67.71 24.45,68.53 24,68.97 v24,76.15 | v27.5,109.17 v27.5,82.75
IO/CHANGE  (via drill 0.3)
  Top 0.127: C5.1 45.21,109.23 46.1,109.23 46.35,109.49 47.31,109.49 CHANGE_BUTTON.4 47.37,109.49 50.8,109.49 CHANGE_BUTTON.3 50.86,109.49 v51.88,109.49 | v54.04,109.23 53.21,109.23 R_CHANGE.1 | v30.35,82.5 30.35,81.87 24.19,75.71 23.05,75.71 14.29,66.94 14.29,65.86 U1.23
  Bottom 0.127: v54.04,109.23 53.78,109.49 v51.88,109.49 51.88,104.92 48.7,101.74 48.7,101.11 30.35,82.75 v30.35,82.5
MISO  (via drill 0.3)
  Top 0.127: J1.P7 5.78,93.49 4.89,93.49 4.38,92.98 4.38,91.07 4.13,90.82 4.13,78.82 6.1,76.85 6.1,75.96 9.21,72.85 9.21,65.86 U1.27 9.21,65.8 9.21,64.02 v18.16,55.07 | v40.07,40.34 39.81,40.34 35.81,36.34 35.81,31.95 35.88,31.89 35.88,31.45 35.5,31.45 D1.2 | v40.07,42.24 40.07,43.26 R7.1 40.07,43.32 40.07,52.21 37.21,55.07 37.21,57.8 37.4,57.99 38.1,57.99 U3.2 38.16,57.99 38.86,57.99 38.92,58.05 38.92,58.75 39.47,59.29 | 39.47,59.29 45.34,65.17 45.34,67.83 54.55,77.04 54.55,77.48 54.86,77.8 54.86,82.18 54.23,82.82 54.23,83.58 53.53,83.58 TP6.TP | v20.19,51.83 20.19,52.08 28.26,60.15 38.61,60.15 39.47,59.29
  Bottom 0.127: v40.07,42.24 v40.07,40.34 | v18.16,55.07 20.38,52.85 20.38,52.02 v20.19,51.83
MOSI  (via drill 0.3)
  Top 0.127: J3.14 81.85,14.94 81.85,14.3 81.72,14.18 70.48,14.18 65.72,18.94 45.28,18.94 36.58,27.64 35.5,27.64 D2.2 35.43,27.64 35.18,27.64 v35.18,30.62 | v15.88,36.46 16.7,36.46 R6.1 | v15.68,47.2 15.56,47.32 15.56,48.34 U1.7 | v41.72,51.89 45.28,55.45 U3.5 45.97,55.45 46.67,55.45 46.74,55.51 46.74,59.77 46.1,60.4 46.1,67.58 56.52,77.99 v56.77,77.99 | v9.91,73.36 9.72,73.55 9.72,86.25 6.86,89.11 5.84,89.11 J1.P3 | v56.77,79.52 56.77,82.12 57.4,82.75 57.4,83.52 58.1,83.52 TP7.TP
  Bottom 0.127: v15.88,36.46 15.88,40.65 16.19,40.97 16.19,46.69 16.16,46.72 | 16.16,46.72 v15.68,47.2 12.26,50.62 12.26,52.4 11.49,53.16 11.49,67.33 10.1,68.72 10.1,69.36 9.27,70.18 9.27,72.72 v9.91,73.36 | v41.72,51.89 35.31,51.89 31.08,47.67 | 31.08,47.67 31.05,47.64 17.08,47.64 16.16,46.72 | v56.77,77.99 v56.77,79.52 | v35.18,30.62 35.18,43.38 31.11,47.45 31.11,47.64 31.08,47.67
N$3
  Top 0.127: IC1.5 50.42,102.12 51.12,102.12 51.5,101.74 52.2,101.74 C_DELAY.1
N$4  (via drill 0.3)
  Top 0.127: 109.44,39.1 109.28,39.26 109.28,40.65 109.6,40.97 110.17,40.97 IC2.1 110.24,40.97 111.32,40.97 113.67,43.32 121.16,43.32 121.41,43.07 | 109.44,39.1 109.47,39.07 110.17,39.07 IC2.3 | C1_BAT1.1 103.57,41.67 106.36,38.88 108.9,38.88 109.09,39.07 109.41,39.07 109.44,39.1 | 121.41,43.07 125.16,39.32 125.16,37.99 D7.1 | v122.43,44.08 122.43,45.1 Q1.2 | 121.41,43.07 v121.28,42.94
  Bottom 0.127: v121.28,42.94 v122.43,44.08
N$5  (via drill 0.3)
  Top 0.127: v107.82,41.1 107.06,41.1 CHG_LED.C | v110.81,44.21 110.93,44.08 111.38,44.08 111.44,44.15 111.44,44.85 R1_BAT.1
  Bottom 0.127: v107.82,41.1 107.82,41.23 v110.81,44.21
N$6
  Top 0.127: R1_BAT.2 112.78,44.91 112.78,48.21 113.03,48.47 113.03,48.91 U4.1
N$7  (via drill 0.3)
  Top 0.127: v109.09,49.67 105.79,52.97 105.79,54.05 R2_BAT.2 | v109.86,48.91 110.81,48.91 U4.5
  Bottom 0.127: v109.86,48.91 v109.09,49.67
N$8  (via drill 0.3)
  Top 0.127: v89.72,54.18 90.49,54.18 R_CAPACITOR.1 | v87,65.48 87,66.5 D8.1
  Bottom 0.127: v89.72,54.18 89.72,62.75 v87,65.48
N$11
  Top 0.127: 93.28,41.35 92.96,41.35 C19.1 93.28,41.35 | 93.28,41.35 93.28,41.03 93.22,40.97 93.22,34.3 93.28,34.24 93.22,34.18 D9.2 | 93.28,41.35 93.66,41.35 93.73,41.42 93.73,43.13 93.53,43.32 92.33,43.32 92.14,43.13 92.14,42.94 90.81,41.61 77.22,41.61 D11.1
N$12  (via drill 0.3)
  Top 0.127: v144.02,46.75 137.6,46.75 R2-USB1.2 | v161.86,51.32 161.73,51.45 160.91,51.45 J4.A5
  Bottom 0.127: v144.02,46.75 157.04,46.75 161.61,51.32 v161.86,51.32
N$13
  Top 0.127: R2-USB.1 147.64,52.97 156.21,52.97 160.02,56.78 160.15,56.78 160.4,56.53 162.12,56.53 162.69,55.96 162.69,55.32 161.86,54.5 160.91,54.5 J4.B5
N$18
  Top 0.127: J3.5 86.36,15 86.36,23 86.81,23.45 86.81,25.1 86.61,25.29 85.92,25.29 EPD_C2.2
N$19
  Top 0.127: J3.4 86.87,15 86.87,23.13 87.06,23.32 87.06,24.34 88.2,25.48 88.9,25.48 EPD_C1.2
N$20
  Top 0.127: J3.18 79.82,15 79.82,25.61 79.57,25.86 78.93,25.86 EPD_C6.2
N$21
  Top 0.127: J3.20 78.87,15 78.87,21.73 77.92,22.68 77.92,25.8 77.66,26.05 76.96,26.05 EPD_C8.2
N$22
  Top 0.127: J3.22 77.85,15 77.85,22.37 76.01,24.21 76.01,25.86 75.63,26.24 74.93,26.24 EPD_C10.2
N$25  (via drill 0.3)
  Top 0.127: v79.38,16.02 79.38,15 J3.19 | v90.87,25.99 91.89,25.99 EPD_C7.2
  Bottom 0.127: v79.38,16.02 89.34,25.99 v90.87,25.99
N$26
  Top 0.127: J3.24 76.83,15 76.83,15.76 74.99,17.6 69.91,17.6 EPD_C12.2
PREVGH  (via drill 0.3)
  Top 0.127: v78.36,16.59 78.36,15 J3.21 | v83.38,21.6 83.57,21.8 83.57,23.7 83.82,23.95 83.82,25.61 83.72,25.7 | 83.72,25.7 83.63,25.8 82.93,25.8 EPD_C9.2 | 83.72,25.7 83.82,25.8 83.82,34.18 83.57,34.43 82.74,34.43 D10.1
  Bottom 0.127: v78.36,16.59 78.36,16.84 83.12,21.6 v83.38,21.6
PREVGL  (via drill 0.3)
  Top 0.127: J3.23 77.34,15 77.34,15.64 75.12,17.86 74.55,17.86 70.99,21.41 69.91,21.41 EPD_C11.2 69.85,21.41 69.66,21.41 69.66,27.13 73.85,31.32 v74.11,31.32 | v74.11,35.32 74.11,41.16 74.17,41.23 74.17,41.61 73.72,41.61 D11.2
  Bottom 0.127: v74.11,31.32 v74.11,35.32
RESE
  Top 0.127: 68.36,13.51 66.23,11.38 65.15,11.38 R12.2 | 68.36,13.51 68.52,13.67 86.74,13.67 87.38,14.3 87.38,14.94 J3.3 | 68.36,13.51 65.09,16.78 65.09,17.73 Q3.2
RESE'
  Top 0.127: R9.2 61.53,13.48 61.53,11.51 61.66,11.38 61.66,10.37 SJ1.2 61.66,10.3 61.66,10.11 65.09,10.11 R12.1
RESET  (via drill 0.3)
  Top 0.127: R_RESET.1 68.07,109.04 67.12,109.04 66.67,109.49 65.72,109.49 RESET_BUTTON.3 65.66,109.49 62.23,109.49 RESET_BUTTON.4 62.17,109.49 61.28,109.49 61.02,109.23 60.01,109.23 C3.1 59.94,109.23 58.86,109.23 58.17,109.93 52.64,109.93 52.39,109.68 52.39,107.2 48.83,103.65 48.83,102.63 48.35,102.15 | 48.35,102.15 48.32,102.12 47.62,102.12 IC1.1 | v11.94,53.48 10.48,52.02 10.48,48.4 U1.3 | v48.45,102.12 48.39,102.12 48.35,102.15
  Bottom 0.127: v11.94,53.48 11.75,53.67 11.75,64.53 48.45,101.23 v48.45,102.12
RTC_RST  (via drill 0.3)
  Top 0.127: v24,67.01 23.56,67.01 23.18,66.63 23.18,65.86 U1.16 | v67.5,76.6 73.09,76.6 84.07,65.61 84.07,63.32 83.95,63.2 83.95,62.18 U5.4
  Bottom 0.127: v24,67.01 25.15,67.01 38.1,79.96 57.34,79.96 59.44,77.86 66.23,77.86 v67.5,76.6
RX  (via drill 0.3)
  Top 0.127: v23.56,76.98 22.54,76.98 13.02,67.45 13.02,65.86 U1.24 | v31.81,85.23 32.26,85.23 33.59,83.9 34.8,83.9 TP2.TP
  Bottom 0.127: v23.56,76.98 23.81,76.98 31.81,84.98 v31.81,85.23
SCK  (via drill 0.3)
  Top 0.127: v13.91,36.27 14.73,36.27 R5.1 | v12.7,45.8 14.29,47.39 14.29,48.34 U1.6 | v9.02,73.67 8.76,73.67 6.35,76.09 6.35,76.98 4.38,78.94 4.38,90.69 5.02,91.33 5.78,91.33 J1.P5 | v46.16,57.42 46.16,57.04 46.29,56.91 46.29,56.72 45.97,56.72 U3.6 | v47.18,58.43 46.99,58.62 46.99,59.9 46.35,60.53 46.35,67.45 56.45,77.55 56.96,77.55 58.1,78.69 58.1,79.58 61.91,83.39 TP8.TP | v82.36,15.76 82.36,15 J3.13 | v36.51,23.83 35.5,23.83 D3.2 35.43,23.83 35.18,23.83 35.18,23.19 v34.92,22.94
  Bottom 0.127: v9.02,73.67 9.02,69.42 11.24,67.2 11.24,53.04 12,52.27 12,49.86 12.7,49.16 v12.7,45.8 12.89,45.61 12.89,38.43 13.91,37.42 v13.91,36.27 14.67,36.27 27.81,23.13 34.73,23.13 v34.92,22.94 | v47.18,58.43 v46.16,57.42 46.16,48.97 35.43,38.24 35.43,31 36.51,29.92 v36.51,23.83 44.77,15.57 82.17,15.57 v82.36,15.76
SCL  (via drill 0.3)
  Top 0.127: J2.4 164.34,21.1 165.1,21.1 165.74,20.46 165.74,17.54 158.43,10.24 151.89,10.24 151.32,10.81 150.5,10.81 R2-PINH.1 150.37,10.81 149.67,10.81 149.35,11.13 149.35,13.22 151.26,15.13 151.26,16.59 SENSOR2.4 151.26,16.65 v151.26,18.56 | v125.03,52.4 124.27,52.4 U2.7 | v106.74,55.77 106.55,55.96 104.08,55.96 103,57.04 90.55,57.04 87.88,54.37 | 87.88,54.37 87.69,54.18 87.69,53.93 87.76,53.86 87.76,52.85 U5.16 | v39.5,69.8 28.96,69.8 28.38,69.23 28,69.23 27.69,69.55 26.8,69.55 26.54,69.29 26.16,69.29 25.91,69.55 25.02,69.55 24.7,69.23 24.32,69.23 24.26,69.29 24.19,69.29 24.07,69.17 22.29,69.17 21.46,68.34 19.81,68.34 18.1,66.63 18.1,65.86 U1.20 | 87.88,54.37 v88.01,54.24
  Bottom 0.127: v106.74,55.77 106.87,55.64 115.95,55.64 119.19,52.4 v125.03,52.4 125.03,44.53 151,18.56 v151.26,18.56 | v39.5,69.8 39.69,69.99 41.27,69.99 42.61,68.66 42.61,66.63 57.21,52.02 57.21,51.64 66.04,42.81 76.58,42.81 v88.01,54.24
SDA  (via drill 0.3)
  Top 0.127: J2.3 164.34,20.08 165.1,20.08 165.48,19.7 165.48,17.67 158.31,10.49 153.67,10.49 153.16,11 152.46,11 R1_PINH.1 152.4,11 151.51,11 151.07,11.45 149.8,11.45 149.61,11.63 149.61,13.1 152.02,15.51 152.02,16.59 SENSOR2.3 152.02,16.65 152.02,17.29 v151.7,17.6 | v123.89,53.42 124.08,53.23 124.08,52.91 124.21,52.91 U2.8 124.27,52.91 125.22,52.91 125.48,52.66 125.48,51.51 v124.59,50.62 | v107.25,56.09 107.12,56.21 104.2,56.21 103.12,57.29 90.42,57.29 86.81,53.67 86.55,53.67 | 86.55,53.67 86.49,53.61 86.49,52.85 U5.15 86.55,53.67 | v42.99,69.55 42.35,68.91 34.1,68.91 33.85,69.17 33.4,69.17 33.15,68.91 32.26,68.91 32,69.17 31.75,69.17 31.37,69.55 30.42,69.55 30.16,69.29 29.91,69.29 29.53,68.91 28.7,68.91 28.64,68.97 27.88,68.97 27.81,68.91 26.86,68.91 26.73,69.04 26.16,69.04 26.04,68.91 25.08,68.91 25.02,68.97 24.32,68.97 24.26,68.91 22.42,68.91 21.59,68.09 20.83,68.09 19.37,66.63 19.37,65.86 U1.19 | v68.58,69.55 68.83,69.55 81.09,57.29 82.61,57.29 86.23,53.67 86.42,53.67 86.49,53.74 86.55,53.67
  Bottom 0.127: v123.89,53.42 123.13,52.66 119.32,52.66 116.08,55.9 107.44,55.9 v107.25,56.09 | v68.58,69.55 v42.99,69.55 | v151.7,17.6 151.57,17.6 124.78,44.4 124.78,50.43 v124.59,50.62
SRC  (via drill 0.3)
  Top 0.127: C19.2 92.9,42.62 92.2,42.62 86.61,37.03 86.61,34.43 86.23,34.43 D10.2 86.17,34.43 84.33,34.43 82.55,36.21 81.6,36.21 80.01,37.8 79.57,37.8 79.5,37.86 L1.1 78.36,37.86 77.28,37.86 v75.82,36.4 | v74.61,32.46 64.45,22.3 64.45,19.89 Q3.3
  Bottom 0.127: v74.61,32.46 74.36,32.72 74.36,34.94 v75.82,36.4
SS_SD  (via drill 0.3)
  Top 0.127: v11.87,47.2 11.75,47.32 11.75,48.34 U1.4 | R2.1 11.37,36.65 v12.19,36.65 12.26,36.65 12.32,36.59 12.32,36.27 35.18,13.41 35.18,12.4 35.43,12.4 D6.2 | v9.65,67.01 9.46,67.2 9.46,86.12 7.56,88.03 6.22,88.03 J1.P2
  Bottom 0.127: v12.19,36.65 12.19,40.53 12.64,40.97 12.64,45.23 11.87,45.99 v11.87,47.2 12.45,47.77 12.45,49.04 11.75,49.73 11.75,52.15 10.99,52.91 10.99,65.67 v9.65,67.01
TX
  Top 0.127: U1.25 11.75,65.86 11.75,67.64 28,83.9 30.61,83.9 TP1.TP
USB_D+  (via drill 0.3)
  Top 0.127: v121.35,45.54 121.35,45.61 127.25,51.51 143.32,51.51 D12.1 | v36.32,38.5 36.2,38.37 34.67,38.37 25.27,47.77 24.45,47.77 24.45,48.34 U1.14
  Bottom 0.127: v121.35,45.54 121.16,45.73 120.08,45.73 114.11,39.77 102.74,39.77 79.44,16.46 78.87,16.46 78.23,15.83 58.99,15.83 v36.32,38.5
USB_D-  (via drill 0.3)
  Top 0.127: v122.36,45.99 122.36,46.24 125.73,49.61 143.32,49.61 D12.3 | v36.77,38.88 36.58,38.88 34.86,40.59 34.23,40.59 25.53,49.29 23.62,49.29 23.18,48.85 23.18,48.4 U1.13
  Bottom 0.127: v122.36,45.99 119.95,45.99 113.98,40.02 102.62,40.02 84.64,22.05 83.19,22.05 77.22,16.08 59.12,16.08 36.77,38.43 v36.77,38.88
VBAT  (via drill 0.3)
  Top 0.3: U2.2 122.3,52.34 122.3,51.96 U2.3 122.17,51.89 121.98,51.89 121.92,51.83 121.79,51.83 121.73,51.77 121.67,51.77 121.54,51.89 119.63,49.99 | 116.78,52.85 119.63,49.99 | 119.63,49.99 121.47,48.15 121.47,47.26 Q1.3 | 116.78,52.85 116.78,53.67 C2_BAT.1 | 116.78,52.85 116.65,52.78 114.68,50.81 113.47,50.81 U4.3 113.28,50.81 112.46,50.81 111.63,49.99 v111,49.99 | v43.5,80.41 40.2,83.71 TP3.TP
  Bottom 0.3: v43.5,80.41 43.56,80.34 57.47,80.34 59.56,78.25 66.36,78.25 67.5,77.1 81.22,77.1 108.14,50.18 110.81,50.18 v111,49.99
VBUS
  Top 0.3: D12.5 145.86,50.56 146.62,50.56 147.38,49.8 147.38,47.58 C4_USB.1 147.38,47.39 147.38,45.67 C5_USB.1 147.38,45.48 147.38,44.21 146.24,43.07 146.24,42.62 146.18,42.56 146.18,41.48 PFMF.050.1.2 146.18,41.35 146.18,40.46 146.11,40.4 144.02,40.4 142.81,39.19 133.41,39.19 131,41.61 130.87,41.67 | 127.41,38.78 130.24,41.61 130.81,41.61 130.87,41.67 | 127.41,38.78 127.25,38.62 127.25,37.99 D7.2 | 130.87,41.67 130.87,42.5 R1_PWRUSB.2 | 120.52,44.47 120.52,45.1 Q1.1 | 120.52,44.47 125.98,39 127.19,39 127.41,38.78 | 109.28,43.7 109.28,49.1 110.55,50.37 110.55,50.81 110.81,50.81 U4.4 110.55,50.94 110.55,51.26 109.47,52.34 109.47,56.59 | 109.28,43.7 109.28,41.16 107.7,39.58 107.06,39.58 CHG_LED.A | 109.47,56.59 109.47,57.48 C1_BAT.1 | 109.47,56.59 104.33,56.59 103.25,57.67 81.22,57.67 61.02,77.86 60.77,77.86 60.39,78.25 59.44,78.25 TP14.TP | 109.28,43.7 119.83,43.7 120.46,44.34 120.52,44.47
VRTC
  Top 0.3: 85.28,51.39 85.28,51.64 85.22,51.7 85.22,52.78 U5.14 | 85.28,51.39 85.28,49.04 C8.1 | C10_SUPERCAP.1 94.3,54.75 93.34,54.75 91.44,52.85 90.55,52.85 R_CAPACITOR.2 90.42,52.85 89.72,52.85 88.27,51.39 85.28,51.39
VUSB
  Top 0.3: J4.A4 160.91,50.24 160.91,50.43 J4.B9 160.78,50.5 160.4,50.5 160.27,50.37 160.08,50.37 159.7,50.75 159.7,51.89 | J4.A9 160.91,55.26 161.23,55.26 161.29,55.2 161.29,55.07 161.23,55.01 160.91,55.01 J4.B4 160.78,55.01 160.4,55.01 160.34,55.07 160.02,55.07 159.7,54.75 159.7,51.89 | 159.7,51.89 147,51.89 146.69,52.21 145.03,52.21 144.53,51.7 144.53,45.86 141.73,43.07 141.73,42.62 141.67,42.56 141.67,41.48 PFMF.050.1.1
(copper drawn outside any net)
  shapes: Bottom area x1, Top area x1